# Altium PCB Single Pulse Gen.PcbDoc
Units mm, origin at the board's own origin, x right, y up, seen from the top; angles counter-clockwise.
Board outline 27.94 x 20.32 mm, 2 copper layers (Top Layer, Bottom Layer), stack 1.6 mm thick; 9 components, 7 nets, 33 pads, 0 vias.
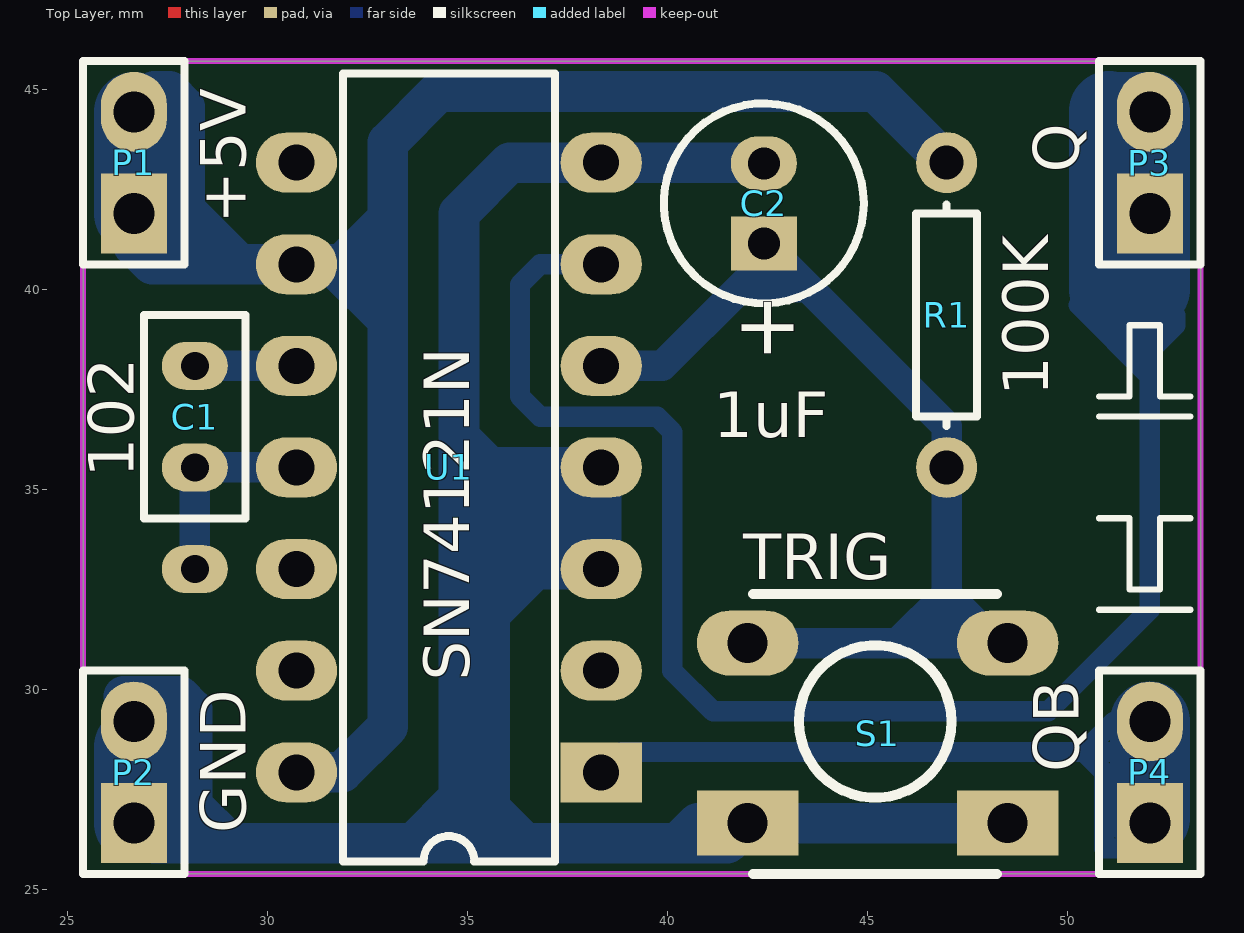
[diagram p0: Top Layer view]
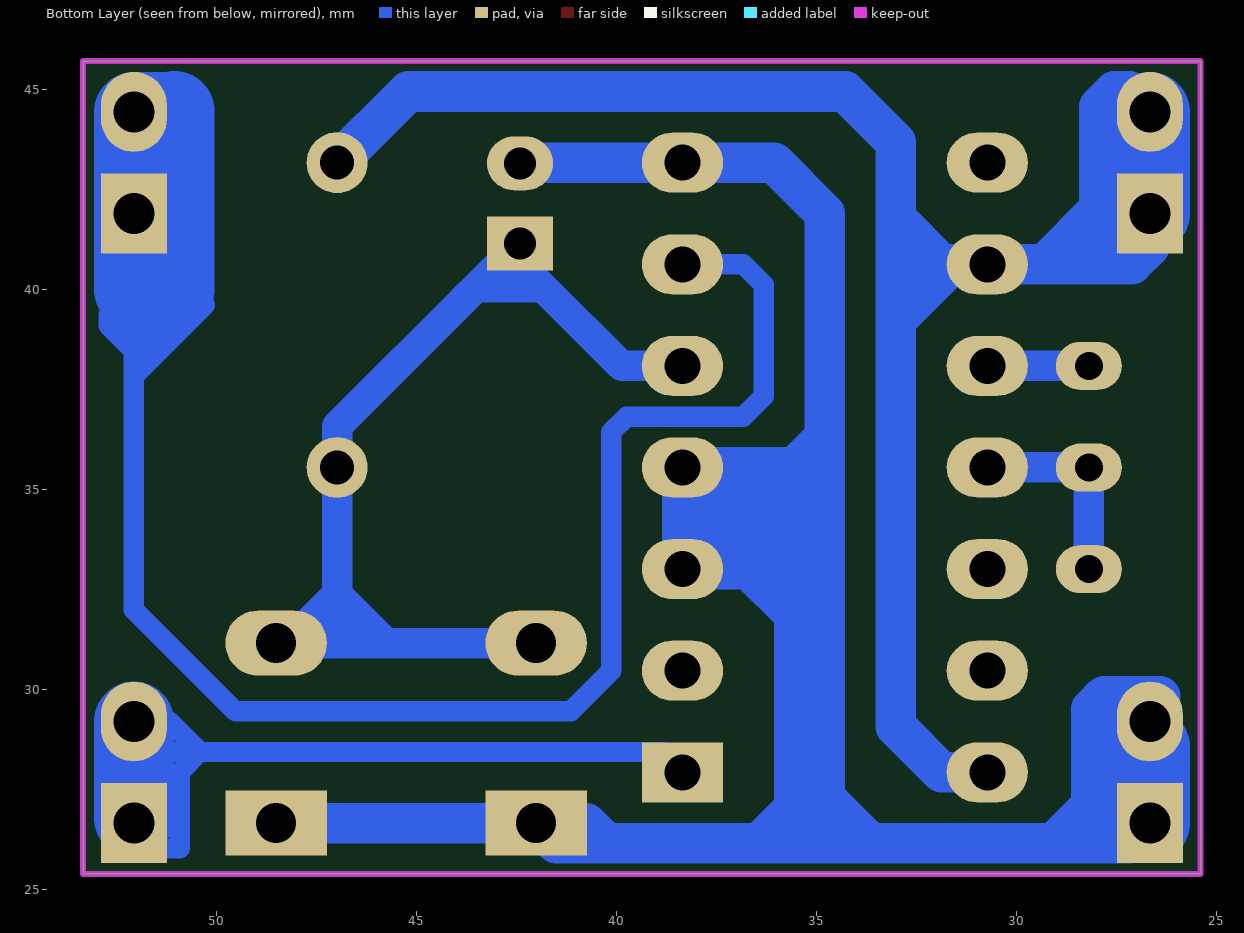
[diagram p1: Bottom Layer view, seen from below]

## Layer stack, top to bottom
Top Layer: signal copper 0.0356
Dielectric: core 1.529, FR-4, Dk 4.8
Bottom Layer: signal copper 0.0356

## Board outline
25.4,25.4 25.4,45.72 53.34,45.72 53.34,25.4

## Design rules (kind name [scope] priority, off if disabled: settings)
Clearance [All] p1: gap=0.178
ComponentClearance [All] p1: gap=0.025 collisioncheckmode=3 verticalgap=0.025 showdistances=TRUE
Height [All] p1: minheight=0 maxheight=76.2 prefheight=12.7
PolygonConnect [All] p1: connectstyle=Relief reliefconductorwidth=0.254 reliefentries=4 polygonreliefangle="90 Angle"
RoutingLayers [All] p1: top layer_v5=FALSE bottom layer_v5=TRUE
RoutingVias [All] p1: holewidth=0.305 width=0.66 viastyle="Through Hole" minholewidth=0.305 minwidth=0.66 maxholewidth=0.711 maxwidth=1.27
SilkToSilkClearance [All] p1: silktosilkclearance=0.102
SilkscreenOverComponentPads [All] p1: minsilkscreentomaskgap=0.102
SolderMaskExpansion [All] p1: expansion=0
Width [All] p1: maxlimit=2.54 minlimit=0.178 preferedwidth=0.254
23 further rules are at their usual default settings.

## Components (designator, comment, footprint, x,y, rotation, side; value= is the part's Value field where it differs from the comment)
C1 "102" RAD-0.1 28.194,36.83 r90 top locked
C2 "1uF" CAPPR2-5X11 42.418,42.164 r90 top locked
P1 "+5V" HDR1X2 26.67,41.91 r90 top locked
P2 "GND" HDR1X2 26.67,26.67 r90 top locked
P3 "Q" HDR1X2 52.07,41.91 r90 top locked
P4 "QB" HDR1X2 52.07,26.67 r90 top locked
R1 "100K" AXIAL-0.3 46.99,39.37 r90 top locked
S1 "TRIG" "RESET SW" 48.514,26.67 r180 top
U1 "SN74121N" N014 34.544,35.56 r90 top locked

## Footprints (in the part's own frame and the unit in brackets; to place one, negate y for a bottom-side part, rotate by r counter-clockwise, add the part's x,y. Pads: shape width x height; smd on the part's side, far side on the other; paste and mask are expansions set on the pad)
AXIAL-0.3 [mil] "Axial Device, Thru-Hole; 2 Leads; 0.3 in Pin Spacing"
  round 60 hole 33.46: 1(-150,0) 2(150,0)
  silkscreen extent -109,-30 109,30
CAPPR2-5X11 [mm] "Capacitor, Electrolytic, Radial; Body 5 x 11 mm (Dia.xH typ); Pin Spacing 2 mm (typ)"
  rect 1.35x1.651 hole 0.8: 1(-1,0)
  oval 1.35x1.651 hole 0.8: 2(1,0)
  silkscreen extent -2.5,-2.5 2.5,2.5
HDR1X2 [mm] "Connector; Header; 2 Position"
  rect 2x1.651 hole 1.02: 1(0,0)
  oval 2x1.651 hole 1.02: 2(2.54,0)
  silkscreen extent -1.27,-1.27 3.81,1.27
N014 [mm] "DIP; 14 Leads; Row Spacing 7.62 mm; Pitch 2.54 mm"
  rect 1.5x2.032 hole 0.9: 1(-7.62,-3.81)
  oval 1.5x2.032 hole 0.9: 2(-5.08,-3.81) 3(-2.54,-3.81) 4(0,-3.81) 5(2.54,-3.81) 6(5.08,-3.81) 7(7.62,-3.81) 8(7.62,3.81) 9(5.08,3.81) 10(2.54,3.81) 11(0,3.81) 12(-2.54,3.81) 13(-5.08,3.81) 14(-7.62,3.81)
  silkscreen extent -9.85,-2.65 9.85,2.65
RAD-0.1 [mm] "Radial Cap, Thru-Hole; 2 Leads; 0.1 in Pin Spacing"
  oval 1.2x1.651 hole 0.7: 1(-1.27,0) 2(1.27,0)
  silkscreen extent -2.54,-1.27 2.54,1.27
"RESET SW" [mm]
  rect 2.54x1.626 hole 1: 1(0,0) 1(6.5,0)
  oval 2.54x1.626 hole 1: 2(0,-4.5) 2(6.5,-4.5)
  silkscreen extent 0.26,-5.72 6.36,1.27, body extent -0.63,-5.29 7.24,0.71, height 8

## Part data
C1: library part Cap, "Capacitor"
C2: library part Cap2, "Capacitor"
P1 P2 P3 P4: library part "Header 2", "Header, 2-Pin"
R1: library part Res2, "Resistor"
S1: library part SW-PB, "Switch"
U1: "Monostable Multivibrator with Schmitt-Trigger Inputs"

## Free pads (board coordinates)
  oval 1.651x1.2 hole 0.7: 0(28.194,33.02)

## Nets (pads, with @x,y where several pads share a name; then routed paths per layer and width w, separated by ;. In a path a pad name is that pad's centre, name@x,y a point inside that pad or via, vN(x,y) a via of type N, cw(c..) or ccw(c..) an arc to the next point about the centre after c; other vN are vias at no path point)
5V: P1.1 P1.2 R1.2 U1.9 U1.14 | length 55.8
  Bottom Layer w1.016: P1.2 27.178,44.958 27.559,44.958 27.94,44.577 27.94,42.012 ; U1.14 31.877,27.94 33.02,29.083 33.02,39.243 ; 33.02,42.037 33.02,41.783 ; R1.2 45.212,44.958 34.29,44.958 33.02,43.688 33.02,41.783 ; 27.94,40.64 P1.1 26.67,41.097 27.127,40.64 27.94,40.64 ; 27.94,40.64 29.312,40.64 ; 27.94,40.64 27.94,42.012 ; 27.94,42.012 29.312,40.64 ; 29.312,40.64 U1.9 31.75,40.64 ; 31.75,40.513 33.02,39.243 ; 31.75,40.513 31.75,40.64 ; 31.75,40.513 31.877,40.64 ; 31.75,40.64 31.877,40.64 ; 31.877,40.64 33.02,41.783 ; 31.877,40.64 33.02,40.64 ; 33.02,39.243 33.02,40.64 ; 33.02,40.64 33.02,41.783
  Bottom Layer w2: P1.1 P1.2
GND: C2.2 P2.1 P2.2 S1.1 U1.3 U1.4 U1.7 | length 83.9
  Bottom Layer w1.016: P2.1 27.178,26.162 28.13,26.162 ; 27.686,29.337 28.13,28.892 ; C2.2 42.402,43.18 U1.7 36.068,43.18 34.798,41.91 34.798,36.322 ; S1.1@48.514,26.67 S1.1@42.014,26.67 ; 28.13,26.162 29.083,26.162 ; 28.13,26.162 28.13,27.114 ; 28.13,27.114 29.083,26.162 ; 28.13,27.114 28.13,28.067 28.13,28.892 ; 28.13,27.114 26.67,28.575 P2.2 26.67,29.591 26.416,29.845 27.813,29.845 28.13,29.527 28.13,28.892 ; 29.083,26.162 33.655,26.162 ; 33.655,26.162 34.671,26.162 ; 33.655,26.162 34.798,27.305 ; 34.671,26.162 35.814,26.162 ; 34.671,26.162 34.798,26.289 34.798,27.305 ; 34.798,27.305 34.798,36.322 ; 34.798,36.322 35.56,35.56 ; 35.56,27.051 35.56,31.877 ; 35.56,27.051 36.449,26.162 ; 35.56,27.051 35.56,26.416 35.814,26.162 ; 35.56,31.877 35.56,33.02 ; 35.56,31.877 36.703,33.02 ; 35.56,33.02 35.56,35.56 ; 35.56,33.02 36.703,33.02 ; 35.56,35.56 U1.4 U1.3 36.703,33.02 ; 35.814,26.162 36.449,26.162 ; 36.449,26.162 40.259,26.162 ; 40.259,26.162 41.506,26.162 S1.1@42.014,26.67 ; 40.259,26.162 40.767,26.67 S1.1@42.014,26.67
  Bottom Layer w2: P2.1 P2.2@26.67,28.575
NetC1_1: C1.1 pad.0 U1.11 | length 5.1
  Bottom Layer w0.762: pad.0 C1.1 U1.11
NetC1_2: C1.2 U1.10 | length 2.5
  Bottom Layer w0.762: C1.2 U1.10
NetC2_1: C2.1 R1.1 S1.2 U1.5 | length 29.6
  Bottom Layer w0.762: U1.5 39.878,38.1 41.846,40.069 ; S1.2@42.014,31.17 45.775,31.17 ; 43.831,39.751 43.513,40.069 ; S1.2@48.514,31.17 S1.2@48.205,31.17 ; 41.846,40.069 42.418,40.64 C2.1 43.513,40.069 ; 41.846,40.069 43.513,40.069 ; 43.513,40.069 46.99,36.592 R1.1 46.99,32.385 ; 45.775,31.17 46.99,31.17 ; 45.775,31.17 46.99,32.385 ; 46.99,31.17 S1.2@48.205,31.17 ; 46.99,31.17 46.99,32.385 ; 46.99,32.385 S1.2@48.205,31.17
NetP3_1: P3.1 P3.2 U1.6 | length 54
  Bottom Layer w0.508: U1.6 36.83,40.64 36.322,40.132 36.322,37.338 36.83,36.83 39.751,36.83 40.132,36.449 40.132,30.48 41.148,29.464 49.53,29.464 52.07,32.004 52.07,37.846 ; 50.292,39.624 52.07,37.846 ; 51.054,40.005 51.054,39.497 52.07,38.481 ; 52.07,37.846 52.07,38.481 ; 52.07,38.481 52.07,40.005 52.705,39.37 52.705,39.116 52.07,38.481
  Bottom Layer w2: 51.054,40.005 52.07,40.005 P3.1 P3.2 51.07,44.45 51.054,44.466 51.054,40.005
NetP4_1: P4.1 P4.2 U1.1 | length 24.3
  Bottom Layer w0.508: U1.1 38.862,28.448 50.419,28.448 ; P4.1 51.435,26.035 50.927,26.035 50.927,27.94 ; P4.1@52.07,26.797 50.927,27.94 ; 50.419,28.448 51.308,28.448 P4.2 51.181,29.21 50.419,28.448 ; 50.419,28.448 50.927,27.94
  Bottom Layer w2: P4.1@52.07,26.797 P4.2
pads on no net: U1.2 U1.8 U1.12 U1.13

## Keep-outs
Keep-Out Layer:
  the board outline again, w0.152

## Other copper
Bottom Layer:
  rectangle net GND: 35.814,33.147 38.354,35.56

## Silkscreen, mask and mechanical layers (free items; w line width, h text height)
Top Overlay:
  lines w0.152: 50.8,32.004 53.086,32.004 ; 50.8,34.29 51.562,34.29 51.562,32.512 52.324,32.512 52.324,34.29 53.086,34.29 ; 50.8,36.83 53.086,36.83 ; 50.8,37.338 51.562,37.338 51.562,39.116 52.324,39.116 52.324,37.338 53.086,37.338

## Text inside footprints (layer, text, board x,y; h text height)
C2: Top Overlay "+" at 43.168,38.189 h1.5 r90